# EAGLE board RGB Matrix Panel v26 (EAGLE 6.4), part 1 of 3
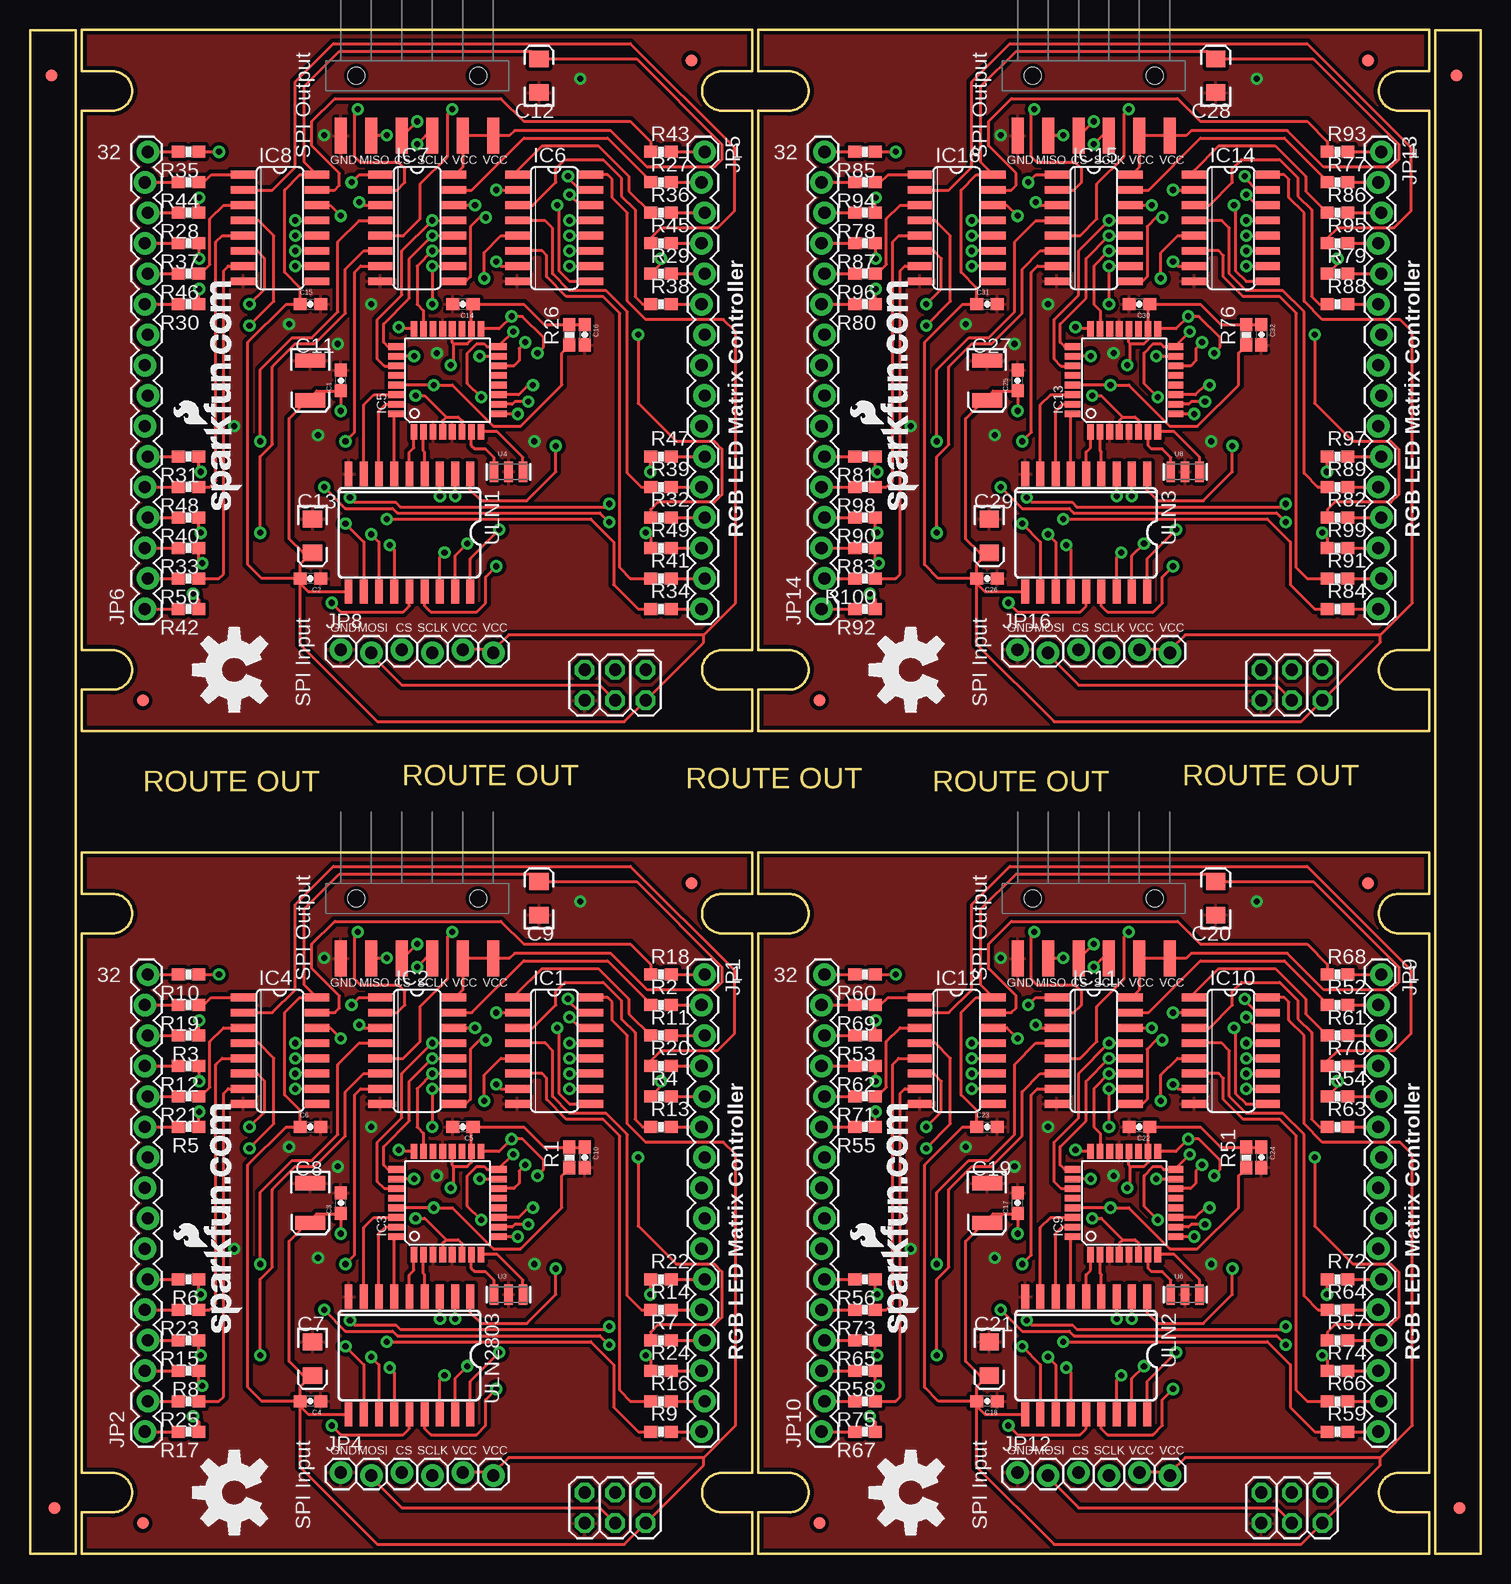
[diagram p0: board, top side]
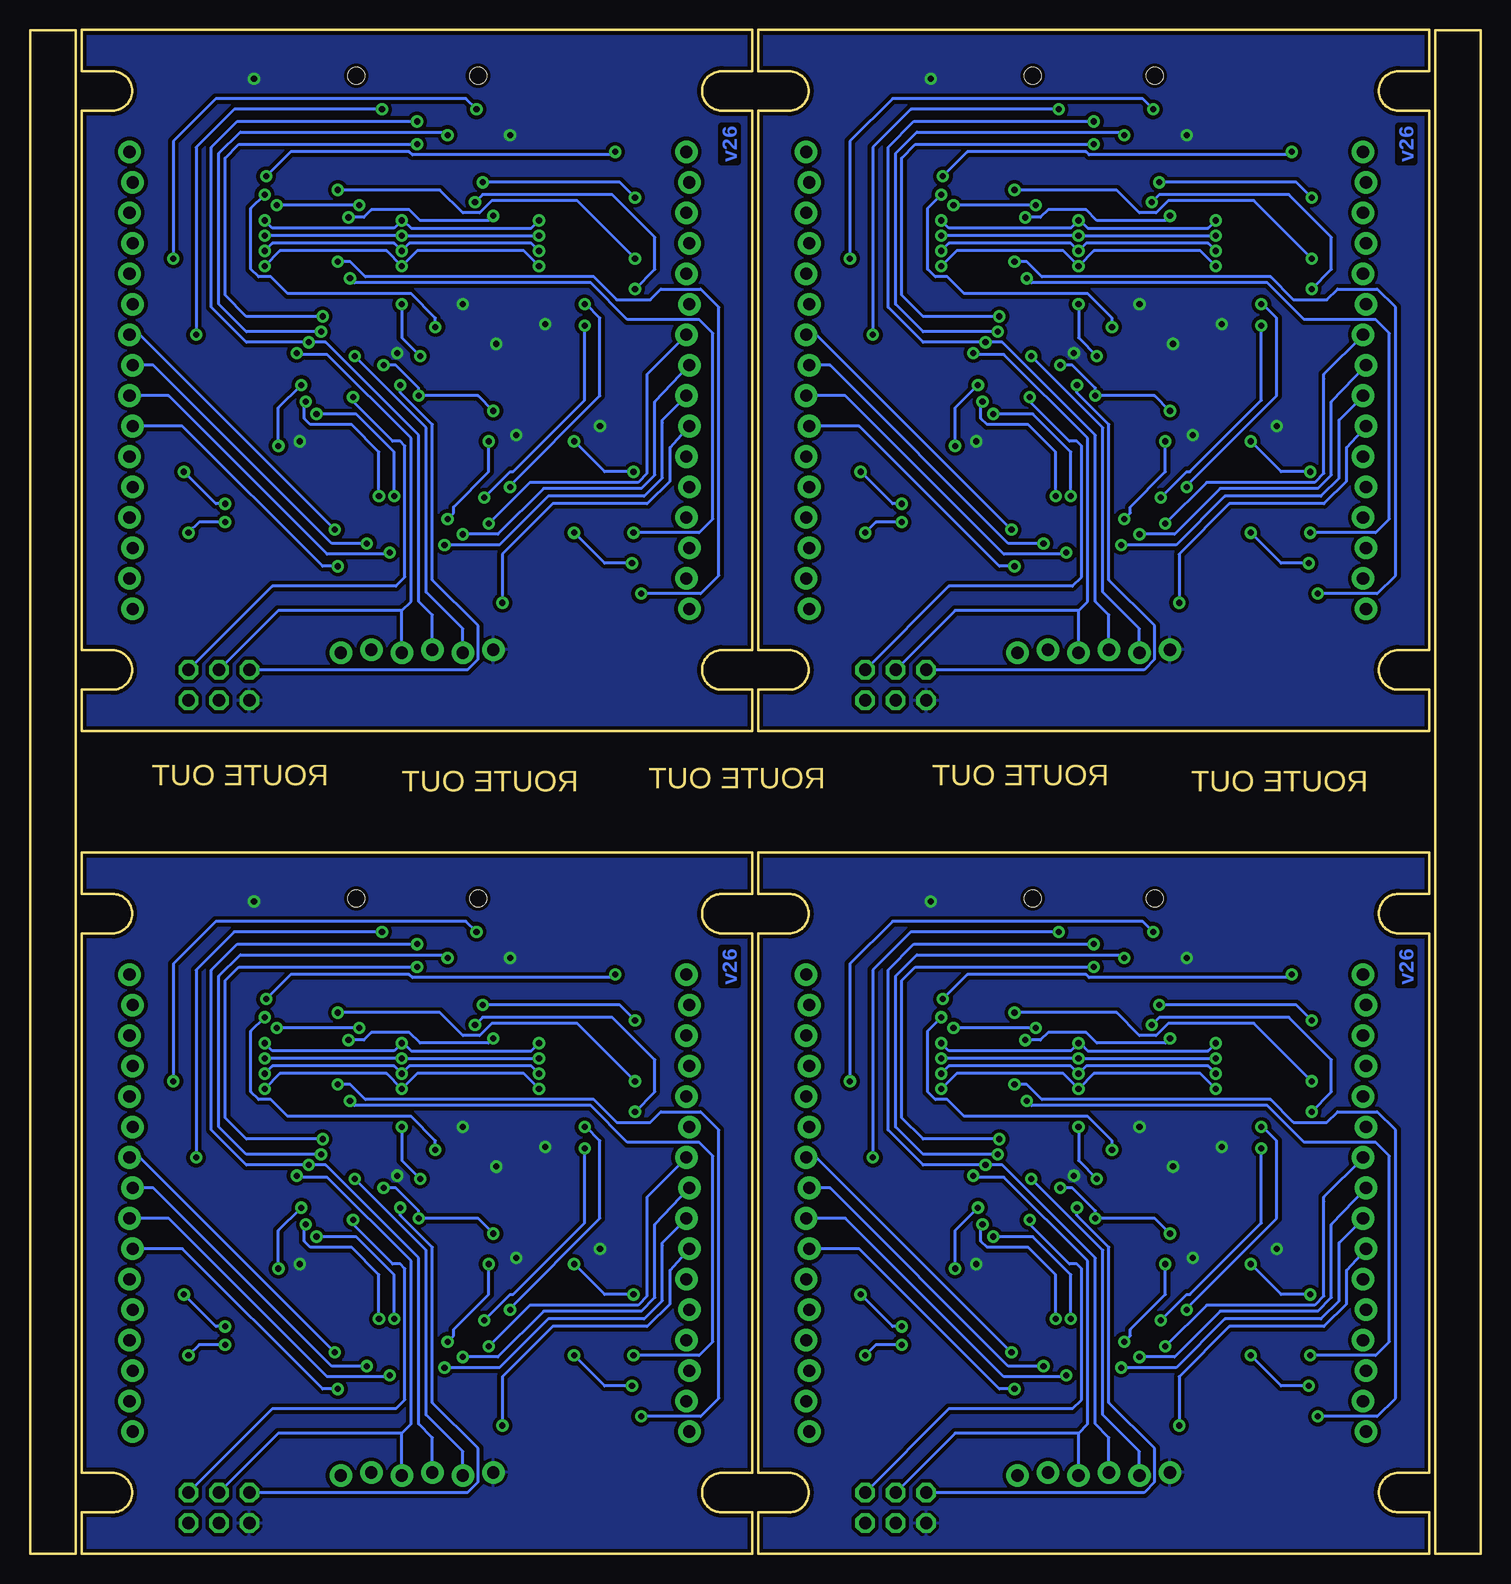
[diagram p1: board, bottom side, seen from below]

Size 120.9 x 127 mm. Coordinates in mm from the lower left corner, seen from the top.
Outline: 60.2,0 60.2,3.43 57.66,3.43 arc-180 57.66,6.73 60.2,6.73 60.2,51.69 57.66,51.69 arc-180 57.66,54.99 60.2,54.99 60.2,58.42 4.32,58.42 4.32,54.99 6.86,54.99 arc-180 6.86,51.69 4.32,51.69 4.32,6.73 6.86,6.73 arc-180 6.86,3.43 4.32,3.43 4.32,0 60.2,0
Outline: 60.2,68.58 60.2,72.01 57.66,72.01 arc-180 57.66,75.31 60.2,75.31 60.2,120.27 57.66,120.27 arc-180 57.66,123.57 60.2,123.57 60.2,127 4.32,127 4.32,123.57 6.86,123.57 arc-180 6.86,120.27 4.32,120.27 4.32,75.31 6.86,75.31 arc-180 6.86,72.01 4.32,72.01 4.32,68.58 60.2,68.58
Outline: 116.59,0 116.59,3.43 114.05,3.43 arc-180 114.05,6.73 116.59,6.73 116.59,51.69 114.05,51.69 arc-180 114.05,54.99 116.59,54.99 116.59,58.42 60.71,58.42 60.71,54.99 63.25,54.99 arc-180 63.25,51.69 60.71,51.69 60.71,6.73 63.25,6.73 arc-180 63.25,3.43 60.71,3.43 60.71,0 116.59,0
Outline: 116.59,68.58 116.59,72.01 114.05,72.01 arc-180 114.05,75.31 116.59,75.31 116.59,120.27 114.05,120.27 arc-180 114.05,123.57 116.59,123.57 116.59,127 60.71,127 60.71,123.57 63.25,123.57 arc-180 63.25,120.27 60.71,120.27 60.71,75.31 63.25,75.31 arc-180 63.25,72.01 60.71,72.01 60.71,68.58 116.59,68.58
Outline: 3.81,0 3.81,127 0,127 0,22.86 0,19.05 0,0 3.81,0
Outline: 120.9,0 120.9,127 117.09,127 117.09,0 120.9,0
Copper layers (1*16): Top 0.035mm / dielectric 1.5mm / Bottom 0.035mm
Design rules "SparkFun": minimum track width 8mil, minimum drill 20mil, track to track 8mil, track to pad 8mil, pad to pad 8mil, via to via 8mil, smd to smd 8mil, copper to edge 10mil, drill to drill 8mil, minimum pad ring 12mil, minimum via ring 10mil, stop-mask expansion 4mil, vias tented up to drill 25mil, thermal gap 10mil
Net classes: 0 default: width 0.203 mm; 1 power: width 0.203 mm

## Footprints (pad centres in the part's own frame; a part is rotated, then mirrored left to right if it is on the bottom)
0603-CAP = smd 1.1 x 1: 1 -0.85,0; 2 0.85,0
EIA3216 = smd 1.4 x 1.6: A 1.4,0; C -1.4,0
EIA3528 = smd 1.2 x 2.5: A 1.65,0; C -1.65,0
FIDUCIAL-1X2 = smd 1 x 1: 1 0,0
SO16 = smd 0.66 x 2.032: 1 -4.445,-3.073; 2 -3.175,-3.073; 3 -1.905,-3.073; 4 -0.635,-3.073; 5 0.635,-3.073; 6 1.905,-3.073; 7 3.175,-3.073; 8 4.445,-3.073; 9 4.445,3.073; 10 3.175,3.073; 11 1.905,3.073; 12 0.635,3.073; 13 -0.635,3.073; 14 -1.905,3.073; 15 -3.175,3.073; 16 -4.445,3.073
TQFP32-08 = smd 1.27 x 0.559: 1 -4.293,2.8; 2 -4.293,2; 3 -4.293,1.2; 4 -4.293,0.4; 5 -4.293,-0.4; 6 -4.293,-1.2; 7 -4.293,-2; 8 -4.293,-2.8; 17 4.293,-2.8; 18 4.293,-2; 19 4.293,-1.2; 20 4.293,-0.4; 21 4.293,0.4; 22 4.293,1.2; 23 4.293,2; 24 4.293,2.8 | smd 0.559 x 1.27: 9 -2.8,-4.293; 10 -2,-4.293; 11 -1.2,-4.293; 12 -0.4,-4.293; 13 0.4,-4.293; 14 1.2,-4.293; 15 2,-4.293; 16 2.8,-4.293; 25 2.8,4.293; 26 2,4.293; 27 1.2,4.293; 28 0.4,4.293; 29 -0.4,4.293; 30 -1.2,4.293; 31 -2,4.293; 32 -2.8,4.293
1X16_LOCK = drill 1.016 pad 1.88: 1 0,0.127; 2 2.54,-0.127; 3 5.08,0.127; 4 7.62,-0.127; 5 10.16,0.127; 6 12.7,-0.127; 7 15.24,0.127; 8 17.78,-0.127; 9 20.32,0.127; 10 22.86,-0.127; 11 25.4,0.127; 12 27.94,-0.127; 13 30.48,0.127; 14 33.02,-0.127; 15 35.56,0.127; 16 38.1,-0.127
1X06-SMD = smd 1 x 3: 1 -6.35,5; 2 -3.81,5; 3 -1.27,5; 4 1.27,5; 5 3.81,5; 6 6.35,5 | hole 1.4: -5.08,0; 5.08,0
1X06_LOCK = drill 1.016 pad 1.88: 1 0,0; 2 2.54,-0.254; 3 5.08,0; 4 7.62,-0.254; 5 10.16,0; 6 12.7,-0.254
0603-RES = smd 1.1 x 1: 1 -0.85,0; 2 0.85,0
2X3 = drill 1.016 octagon: 1 0,0; 2 0,2.54; 3 2.54,0; 4 2.54,2.54; 5 5.08,0; 6 5.08,2.54
RESONATOR-SMD = smd 0.7 x 1.7: 1 -1.2,0; 2 0,0; 3 1.2,0
SO18L = smd 0.66 x 2.032: 1 -0.635,-4.902; 2 0.635,-4.902; 3 1.905,-4.902; 4 3.175,-4.902; 5 4.445,-4.902; 6 5.715,-4.902; 7 6.985,-4.902; 8 8.255,-4.902; 9 9.525,-4.902; 10 9.525,4.902; 11 8.255,4.902; 12 6.985,4.902; 13 5.715,4.902; 14 4.445,4.902; 15 3.175,4.902; 16 1.905,4.902; 17 0.635,4.902; 18 -0.635,4.902

## Placement (x,y rotation side)
C1  0.1uf  [0603-CAP]  25.91,97.79 90 top
C2  0.1uf  [0603-CAP]  23.37,81.28 180 top
C3  0.1uf  [0603-CAP]  25.91,29.21 90 top
C4  0.1uf  [0603-CAP]  23.37,12.7 180 top
C5  0.1uF  [0603-CAP]  36.07,35.56 180 top
C6  0.1uF  [0603-CAP]  23.37,35.56 0 top
C7  10uF  [EIA3216]  23.54,16.24 270 top
C8  47uF  [EIA3528]  23.37,29.21 270 top
C9  10uF  [EIA3216]  42.42,54.61 90 top
C10  0.1uF  [0603-CAP]  46.23,33.02 270 top
C11  47uF  [EIA3528]  23.37,97.79 270 top
C12  10uF  [EIA3216]  42.42,123.19 90 top
C13  10uF  [EIA3216]  23.54,84.82 270 top
C14  0.1uF  [0603-CAP]  36.07,104.14 180 top
C15  0.1uF  [0603-CAP]  23.37,104.14 0 top
C16  0.1uF  [0603-CAP]  46.23,101.6 270 top
C17  0.1uf  [0603-CAP]  82.3,29.21 90 top
C18  0.1uf  [0603-CAP]  79.76,12.7 180 top
C19  47uF  [EIA3528]  79.76,29.21 270 top
C20  10uF  [EIA3216]  98.81,54.61 90 top
C21  10uF  [EIA3216]  79.93,16.24 270 top
C22  0.1uF  [0603-CAP]  92.46,35.56 180 top
C23  0.1uF  [0603-CAP]  79.76,35.56 0 top
C24  0.1uF  [0603-CAP]  102.62,33.02 270 top
C25  0.1uf  [0603-CAP]  82.3,97.79 90 top
C26  0.1uf  [0603-CAP]  79.76,81.28 180 top
C27  47uF  [EIA3528]  79.76,97.79 270 top
C28  10uF  [EIA3216]  98.81,123.19 90 top
C29  10uF  [EIA3216]  79.93,84.82 270 top
C30  0.1uF  [0603-CAP]  92.46,104.14 180 top
C31  0.1uF  [0603-CAP]  79.76,104.14 0 top
C32  0.1uF  [0603-CAP]  102.62,101.6 270 top
E$1  [FIDUCIAL-1X2]  2.03,3.81 0 top
E$2  [FIDUCIAL-1X2]  119.13,3.81 0 top
E$3  [FIDUCIAL-1X2]  118.87,123.19 180 top
E$4  [FIDUCIAL-1X2]  1.78,123.19 180 top
IC1  74LS595D  [SO16]  43.69,41.91 270 top
IC2  74LS595D  [SO16]  32.26,41.91 270 top
IC3  AVR-MEGA8-AI  [TQFP32-08]  34.79,29.22 90 top
IC4  74LS595D  [SO16]  20.83,41.91 270 top
IC5  AVR-MEGA8-AI  [TQFP32-08]  34.79,97.8 90 top
IC6  74LS595D  [SO16]  43.69,110.49 270 top
IC7  74LS595D  [SO16]  32.26,110.49 270 top
IC8  74LS595D  [SO16]  20.83,110.49 270 top
IC9  AVR-MEGA8-AI  [TQFP32-08]  91.18,29.22 90 top
IC10  74LS595D  [SO16]  100.08,41.91 270 top
IC11  74LS595D  [SO16]  88.65,41.91 270 top
IC12  74LS595D  [SO16]  77.22,41.91 270 top
IC13  AVR-MEGA8-AI  [TQFP32-08]  91.18,97.8 90 top
IC14  74LS595D  [SO16]  100.08,110.49 270 top
IC15  74LS595D  [SO16]  88.65,110.49 270 top
IC16  74LS595D  [SO16]  77.22,110.49 270 top
JP1  M16LOCK  [1X16_LOCK]  56.09,48.26 270 top
JP2  M16LOCK  [1X16_LOCK]  9.69,10.16 90 top
JP3  [1X06-SMD]  32.26,54.61 180 top
JP4  [1X06_LOCK]  25.91,6.76 0 top
JP5  M16LOCK  [1X16_LOCK]  56.09,116.84 270 top
JP6  M16LOCK  [1X16_LOCK]  9.69,78.74 90 top
JP7  [1X06-SMD]  32.26,123.19 180 top
JP8  [1X06_LOCK]  25.91,75.34 0 top
JP9  M16LOCK  [1X16_LOCK]  112.48,48.26 270 top
JP10  M16LOCK  [1X16_LOCK]  66.08,10.16 90 top
JP11  [1X06-SMD]  88.65,54.61 180 top
JP12  [1X06_LOCK]  82.3,6.76 0 top
JP13  M16LOCK  [1X16_LOCK]  112.48,116.84 270 top
JP14  M16LOCK  [1X16_LOCK]  66.08,78.74 90 top
JP15  [1X06-SMD]  88.65,123.19 180 top
JP16  [1X06_LOCK]  82.3,75.34 0 top
LOGO1  OSHW-LOGOL  [OSHW-LOGO-L]  17.02,5.08 90 top
LOGO2  OSHW-LOGOL  [OSHW-LOGO-L]  17.02,73.66 90 top
LOGO3  OSHW-LOGOL  [OSHW-LOGO-L]  73.41,5.08 90 top
LOGO4  OSHW-LOGOL  [OSHW-LOGO-L]  73.41,73.66 90 top
R1  10k  [0603-RES]  44.96,33.02 90 top
R2  100  [0603-RES]  52.58,45.72 0 top
R3  100  [0603-RES]  13.21,43.18 180 top
R4  100  [0603-RES]  52.58,38.1 0 top
R5  100  [0603-RES]  13.21,35.56 180 top
R6  100  [0603-RES]  13.21,22.86 180 top
R7  100  [0603-RES]  52.58,17.78 0 top
R8  100  [0603-RES]  13.21,15.24 180 top
R9  100  [0603-RES]  52.58,10.16 0 top
R10  100  [0603-RES]  13.21,48.26 180 top
R11  100  [0603-RES]  52.58,43.18 0 top
R12  100  [0603-RES]  13.21,40.64 180 top
R13  100  [0603-RES]  52.58,35.56 0 top
R14  100  [0603-RES]  52.58,20.32 0 top
R15  100  [0603-RES]  13.21,17.78 180 top
R16  100  [0603-RES]  52.58,12.7 0 top
R17  100  [0603-RES]  13.21,10.16 180 top
R18  100  [0603-RES]  52.58,48.26 0 top
R19  100  [0603-RES]  13.21,45.72 180 top
R20  100  [0603-RES]  52.58,40.64 0 top
R21  100  [0603-RES]  13.21,38.1 180 top
R22  100  [0603-RES]  52.58,22.86 0 top
R23  100  [0603-RES]  13.21,20.32 180 top
R24  100  [0603-RES]  52.58,15.24 0 top
R25  100  [0603-RES]  13.21,12.7 180 top
R26  10k  [0603-RES]  44.96,101.6 90 top
R27  100  [0603-RES]  52.58,114.3 0 top
R28  100  [0603-RES]  13.21,111.76 180 top
R29  100  [0603-RES]  52.58,106.68 0 top
R30  100  [0603-RES]  13.21,104.14 180 top
R31  100  [0603-RES]  13.21,91.44 180 top
R32  100  [0603-RES]  52.58,86.36 0 top
R33  100  [0603-RES]  13.21,83.82 180 top
R34  100  [0603-RES]  52.58,78.74 0 top
R35  100  [0603-RES]  13.21,116.84 180 top
R36  100  [0603-RES]  52.58,111.76 0 top
R37  100  [0603-RES]  13.21,109.22 180 top
R38  100  [0603-RES]  52.58,104.14 0 top
R39  100  [0603-RES]  52.58,88.9 0 top
R40  100  [0603-RES]  13.21,86.36 180 top
R41  100  [0603-RES]  52.58,81.28 0 top
R42  100  [0603-RES]  13.21,78.74 180 top
R43  100  [0603-RES]  52.58,116.84 0 top
R44  100  [0603-RES]  13.21,114.3 180 top
R45  100  [0603-RES]  52.58,109.22 0 top
R46  100  [0603-RES]  13.21,106.68 180 top
R47  100  [0603-RES]  52.58,91.44 0 top
R48  100  [0603-RES]  13.21,88.9 180 top
R49  100  [0603-RES]  52.58,83.82 0 top
R50  100  [0603-RES]  13.21,81.28 180 top
R51  10k  [0603-RES]  101.35,33.02 90 top
R52  100  [0603-RES]  108.97,45.72 0 top
R53  100  [0603-RES]  69.6,43.18 180 top
R54  100  [0603-RES]  108.97,38.1 0 top
R55  100  [0603-RES]  69.6,35.56 180 top
R56  100  [0603-RES]  69.6,22.86 180 top
R57  100  [0603-RES]  108.97,17.78 0 top
R58  100  [0603-RES]  69.6,15.24 180 top
R59  100  [0603-RES]  108.97,10.16 0 top
R60  100  [0603-RES]  69.6,48.26 180 top
R61  100  [0603-RES]  108.97,43.18 0 top
R62  100  [0603-RES]  69.6,40.64 180 top
R63  100  [0603-RES]  108.97,35.56 0 top
R64  100  [0603-RES]  108.97,20.32 0 top
R65  100  [0603-RES]  69.6,17.78 180 top
R66  100  [0603-RES]  108.97,12.7 0 top
R67  100  [0603-RES]  69.6,10.16 180 top
R68  100  [0603-RES]  108.97,48.26 0 top
R69  100  [0603-RES]  69.6,45.72 180 top
R70  100  [0603-RES]  108.97,40.64 0 top
R71  100  [0603-RES]  69.6,38.1 180 top
R72  100  [0603-RES]  108.97,22.86 0 top
R73  100  [0603-RES]  69.6,20.32 180 top
R74  100  [0603-RES]  108.97,15.24 0 top
R75  100  [0603-RES]  69.6,12.7 180 top
R76  10k  [0603-RES]  101.35,101.6 90 top
R77  100  [0603-RES]  108.97,114.3 0 top
R78  100  [0603-RES]  69.6,111.76 180 top
R79  100  [0603-RES]  108.97,106.68 0 top
R80  100  [0603-RES]  69.6,104.14 180 top
R81  100  [0603-RES]  69.6,91.44 180 top
R82  100  [0603-RES]  108.97,86.36 0 top
R83  100  [0603-RES]  69.6,83.82 180 top
R84  100  [0603-RES]  108.97,78.74 0 top
R85  100  [0603-RES]  69.6,116.84 180 top
R86  100  [0603-RES]  108.97,111.76 0 top
R87  100  [0603-RES]  69.6,109.22 180 top
R88  100  [0603-RES]  108.97,104.14 0 top
R89  100  [0603-RES]  108.97,88.9 0 top
R90  100  [0603-RES]  69.6,86.36 180 top
R91  100  [0603-RES]  108.97,81.28 0 top
R92  100  [0603-RES]  69.6,78.74 180 top
R93  100  [0603-RES]  108.97,116.84 0 top
R94  100  [0603-RES]  69.6,114.3 180 top
R95  100  [0603-RES]  108.97,109.22 0 top
R96  100  [0603-RES]  69.6,106.68 180 top
R97  100  [0603-RES]  108.97,91.44 0 top
R98  100  [0603-RES]  69.6,88.9 180 top
R99  100  [0603-RES]  108.97,83.82 0 top
R100  100  [0603-RES]  69.6,81.28 180 top
U1  AVR_SPI_PRG_6PTH  [2X3]  51.31,73.66 180 top
U2  AVR_SPI_PRG_6PTH  [2X3]  51.31,5.08 180 top
U3  16 MHz  [RESONATOR-SMD]  39.88,21.59 0 top
U4  16 MHz  [RESONATOR-SMD]  39.88,90.17 0 top
U5  AVR_SPI_PRG_6PTH  [2X3]  107.7,5.08 180 top
U6  16 MHz  [RESONATOR-SMD]  96.27,21.59 0 top
U7  AVR_SPI_PRG_6PTH  [2X3]  107.7,73.66 180 top
U8  16 MHz  [RESONATOR-SMD]  96.27,90.17 0 top
U$1  FIDUCIAL1X2  [FIDUCIAL-1X2]  9.4,2.54 90 top
U$2  FIDUCIAL1X2  [FIDUCIAL-1X2]  9.4,71.12 90 top
U$3  FIDUCIAL1X2  [FIDUCIAL-1X2]  55.12,55.88 90 top
U$4  FIDUCIAL1X2  [FIDUCIAL-1X2]  55.12,124.46 90 top
U$5  [SFE-NEW-WEBLOGO]  17.65,87 90 top
U$6  FIDUCIAL1X2  [FIDUCIAL-1X2]  65.79,2.54 90 top
U$7  FIDUCIAL1X2  [FIDUCIAL-1X2]  111.51,55.88 90 top
U$8  [SFE-NEW-WEBLOGO]  17.65,18.41 90 top
U$9  [SFE-NEW-WEBLOGO]  74.04,18.41 90 top
U$10  FIDUCIAL1X2  [FIDUCIAL-1X2]  65.79,71.12 90 top
U$11  FIDUCIAL1X2  [FIDUCIAL-1X2]  111.51,124.46 90 top
U$12  [SFE-NEW-WEBLOGO]  74.04,87 90 top
ULN1  [SO18L]  36.07,85.09 180 top
ULN2  [SO18L]  92.46,16.51 180 top
ULN3  [SO18L]  92.46,85.09 180 top
ULN2803  [SO18L]  36.07,16.51 180 top

## Library data of the parts
C1-C6 C10 C14-C18 C22-C26 C30-C32 R1-R100 = SparkFun-Passives
C7-C9 C11-C13 C19-C21 C27-C29 IC1-IC16 JP3 JP7 JP11 JP15 U1-U8 U$1-U$12 ULN1-ULN3 ULN2803 = SparkFun
E$1-E$4 LOGO1-LOGO4 = SparkFun-Aesthetics
JP1 JP2 JP4-JP6 JP8-JP10 JP12-JP14 JP16 = SparkFun-Connectors

## Nets
B1: JP1.1 R18.2
B2: JP2.15 R19.2
B3: JP1.4 R20.2
B4: JP2.12 R21.2
B5: JP1.11 R22.2
B6: JP2.5 R23.2
B7: JP1.14 R24.2
B8: JP2.2 R25.2
B9: JP5.1 R43.2
B10: JP6.15 R44.2
B11: JP5.4 R45.2
B12: JP6.12 R46.2
B13: JP5.11 R47.2
B14: JP6.5 R48.2
B15: JP5.14 R49.2
B16: JP6.2 R50.2
B17: JP9.1 R68.2
B18: JP10.15 R69.2
B19: JP9.4 R70.2
B20: JP10.12 R71.2
B21: JP9.11 R72.2
B22: JP10.5 R73.2
B23: JP9.14 R74.2
B24: JP10.2 R75.2
B25: JP13.1 R93.2
B26: JP14.15 R94.2
B27: JP13.4 R95.2
B28: JP14.12 R96.2
B29: JP13.11 R97.2
B30: JP14.5 R98.2
B31: JP13.14 R99.2
B32: JP14.2 R100.2
CS: IC3.14 JP3.4 JP4.3
CS1: IC5.14 JP7.4 JP8.3
CS2: IC9.14 JP11.4 JP12.3
CS3: IC13.14 JP15.4 JP16.3
G1: JP1.2 R2.2
G2: JP2.14 R3.2
G3: JP1.5 R4.2
G4: JP2.11 R5.2
G5: JP2.6 R6.2
G6: JP1.13 R7.2
G7: JP2.3 R8.2
G8: JP1.16 R9.2
G9: JP5.2 R27.2
G10: JP6.14 R28.2
G11: JP5.5 R29.2
G12: JP6.11 R30.2
G13: JP6.6 R31.2
G14: JP5.13 R32.2
G15: JP6.3 R33.2
G16: JP5.16 R34.2
G17: JP9.2 R52.2
G18: JP10.14 R53.2
G19: JP9.5 R54.2
G20: JP10.11 R55.2
G21: JP10.6 R56.2
G22: JP9.13 R57.2
G23: JP10.3 R58.2
G24: JP9.16 R59.2
G25: JP13.2 R77.2
G26: JP14.14 R78.2
G27: JP13.5 R79.2
G28: JP14.11 R80.2
G29: JP14.6 R81.2
G30: JP13.13 R82.2
G31: JP14.3 R83.2
G32: JP13.16 R84.2
GND [power]: C3.2 C4.1 C5.2 C6.2 C7.C C8.C C9.C C10.2 IC1.8 IC2.8 IC3.3 IC3.5 IC3.21 IC4.8 JP3.6 JP4.1 U2.6 U3.2 ULN2803.9
GND1 [power]: C1.2 C2.1 C11.C C12.C C13.C C14.2 C15.2 C16.2 IC5.3 IC5.5 IC5.21 IC6.8 IC7.8 IC8.8 JP7.6 JP8.1 U1.6 U4.2 ULN1.9
GND2 [power]: C17.2 C18.1 C19.C C20.C C21.C C22.2 C23.2 C24.2 IC9.3 IC9.5 IC9.21 IC10.8 IC11.8 IC12.8 JP11.6 JP12.1 U5.6 U6.2 ULN2.9
GND3 [power]: C25.2 C26.1 C27.C C28.C C29.C C30.2 C31.2 C32.2 IC13.3 IC13.5 IC13.21 IC14.8 IC15.8 IC16.8 JP15.6 JP16.1 U7.6 U8.2 ULN3.9
MISO: IC3.16 JP3.5 U2.1
MISO1: IC5.16 JP7.5 U1.1
MISO2: IC9.16 JP11.5 U5.1
MISO3: IC13.16 JP15.5 U7.1
MOSI: IC3.15 JP4.2 U2.4
MOSI1: IC5.15 JP8.2 U1.4
MOSI2: IC9.15 JP12.2 U5.4
MOSI3: IC13.15 JP16.2 U7.4
N$1: IC3.7 U3.1
N$2: IC3.8 U3.3
N$3: IC6.15 R35.1
N$4: IC6.1 R36.1
N$5: IC6.2 R37.1
N$6: IC6.3 R38.1
N$7: IC6.4 R39.1
N$8: IC6.5 R40.1
N$9: IC6.6 R41.1
N$10: IC6.7 R42.1
N$11: IC1.9 IC2.14
N$12: IC1.15 R10.1
N$13: IC1.1 R11.1
N$14: IC1.2 R12.1
N$15: IC1.3 R13.1
N$16: IC2.9 IC4.14
N$17: IC7.15 R27.1
N$18: IC1.4 R14.1
N$19: IC1.5 R15.1
N$20: IC1.6 R16.1
N$21: IC1.7 R17.1
N$22: IC2.15 R2.1
N$23: IC2.1 R3.1
N$24: IC2.2 R4.1
N$25: IC2.3 R5.1
N$26: IC2.4 R6.1
N$27: IC2.5 R7.1
N$28: IC2.6 R8.1
N$29: IC2.7 R9.1
N$30: IC7.1 R28.1
N$31: IC7.2 R29.1
N$32: IC4.15 R18.1
N$33: IC4.1 R19.1
N$34: IC4.2 R20.1
N$35: IC4.3 R21.1
N$36: IC4.4 R22.1
N$37: IC4.5 R23.1
N$38: IC4.6 R24.1
N$39: IC4.7 R25.1
N$40: IC7.3 R30.1
N$41: IC7.4 R31.1
N$42: IC7.5 R32.1
N$43: IC7.6 R33.1
N$44: IC7.7 R34.1
N$45: IC8.15 R43.1
N$46: IC8.1 R44.1
N$47: IC8.2 R45.1
N$48: IC8.3 R46.1
N$49: IC8.4 R47.1
N$50: IC8.5 R48.1
N$51: IC8.6 R49.1
N$52: IC8.7 R50.1
N$53: IC6.9 IC7.14
N$54: IC7.9 IC8.14
N$55: IC5.7 U4.1
N$56: IC5.8 U4.3
N$57: IC10.15 R60.1
N$58: IC10.1 R61.1
N$59: IC10.2 R62.1
N$60: IC10.3 R63.1
N$61: IC10.4 R64.1
N$62: IC10.5 R65.1
N$63: IC10.6 R66.1
N$64: IC10.7 R67.1
N$65: IC11.15 R52.1
N$66: IC11.1 R53.1
N$67: IC11.2 R54.1
N$68: IC11.3 R55.1
N$69: IC11.4 R56.1
N$70: IC11.5 R57.1
N$71: IC11.6 R58.1
N$72: IC11.7 R59.1
N$73: IC12.15 R68.1
N$74: IC12.1 R69.1
N$75: IC12.2 R70.1
N$76: IC12.3 R71.1
N$77: IC12.4 R72.1
N$78: IC12.5 R73.1
N$79: IC12.6 R74.1
N$80: IC12.7 R75.1
N$81: IC10.9 IC11.14
N$82: IC11.9 IC12.14
N$83: IC9.7 U6.1
N$84: IC9.8 U6.3
N$85: IC14.15 R85.1
N$86: IC14.1 R86.1
N$87: IC14.2 R87.1
N$88: IC14.3 R88.1
N$89: IC14.4 R89.1
N$90: IC14.5 R90.1
N$91: IC14.6 R91.1
N$92: IC14.7 R92.1
N$93: IC15.15 R77.1
N$94: IC15.1 R78.1
N$95: IC15.2 R79.1
N$96: IC15.3 R80.1
N$97: IC15.4 R81.1
N$98: IC15.5 R82.1
N$99: IC15.6 R83.1
N$100: IC15.7 R84.1
N$101: IC16.15 R93.1
N$102: IC16.1 R94.1
N$103: IC16.2 R95.1
N$104: IC16.3 R96.1
N$105: IC16.4 R97.1
N$106: IC16.5 R98.1
N$107: IC16.6 R99.1
N$108: IC16.7 R100.1
N$109: IC14.9 IC15.14
N$110: IC15.9 IC16.14
N$111: IC13.7 U8.1
N$112: IC13.8 U8.3
R1: JP2.16 R10.2
R2: JP1.3 R11.2
R3: JP2.13 R12.2
R4: JP1.6 R13.2
R5: JP1.12 R14.2
R6: JP2.4 R15.2
R7: JP1.15 R16.2
R8: JP2.1 R17.2
R9: JP6.16 R35.2
R10: JP5.3 R36.2
R11: JP6.13 R37.2
R12: JP5.6 R38.2
R13: JP5.12 R39.2
R14: JP6.4 R40.2
R15: JP5.15 R41.2
R16: JP6.1 R42.2
R17: JP10.16 R60.2
R18: JP9.3 R61.2
R19: JP10.13 R62.2
R20: JP9.6 R63.2
R21: JP9.12 R64.2
R22: JP10.4 R65.2
R23: JP9.15 R66.2
R24: JP10.1 R67.2
R25: JP14.16 R85.2
R26: JP13.3 R86.2
R27: JP14.13 R87.2
R28: JP13.6 R88.2
R29: JP13.12 R89.2
R30: JP14.4 R90.2
R31: JP13.15 R91.2
R32: JP14.1 R92.2
ROW1 [power]: JP2.10 ULN2803.11
ROW2 [power]: JP2.9 ULN2803.12
ROW3 [power]: JP2.8 ULN2803.13
ROW4 [power]: JP2.7 ULN2803.14
ROW5 [power]: JP1.10 ULN2803.15
ROW6 [power]: JP1.9 ULN2803.16
ROW7 [power]: JP1.8 ULN2803.17
ROW8 [power]: JP1.7 ULN2803.18
ROW9 [power]: JP5.7 ULN1.18
ROW10 [power]: JP5.8 ULN1.17
ROW11 [power]: JP5.9 ULN1.16
ROW12 [power]: JP5.10 ULN1.15
ROW13 [power]: JP6.7 ULN1.14
ROW14 [power]: JP6.8 ULN1.13
ROW15 [power]: JP6.9 ULN1.12
ROW16 [power]: JP6.10 ULN1.11
ROW17 [power]: JP9.7 ULN2.18
ROW18 [power]: JP9.8 ULN2.17
ROW19 [power]: JP9.9 ULN2.16
ROW20 [power]: JP9.10 ULN2.15
ROW21 [power]: JP10.7 ULN2.14
ROW22 [power]: JP10.8 ULN2.13
ROW23 [power]: JP10.9 ULN2.12
ROW24 [power]: JP10.10 ULN2.11
ROW25 [power]: JP13.7 ULN3.18
ROW26 [power]: JP13.8 ULN3.17
ROW27 [power]: JP13.9 ULN3.16
ROW28 [power]: JP13.10 ULN3.15
ROW29 [power]: JP14.7 ULN3.14
ROW30 [power]: JP14.8 ULN3.13
ROW31 [power]: JP14.9 ULN3.12
ROW32 [power]: JP14.10 ULN3.11
ROW_1: IC3.30 ULN2803.8
ROW_2: IC3.31 ULN2803.7
ROW_3: IC3.32 ULN2803.6
ROW_4: IC3.1 ULN2803.5
ROW_5: IC3.2 ULN2803.4
ROW_6: IC3.9 ULN2803.3
ROW_7: IC3.10 ULN2803.2
ROW_8: IC3.11 ULN2803.1
ROW_9: IC5.11 ULN1.1
ROW_10: IC5.10 ULN1.2
ROW_11: IC5.9 ULN1.3
ROW_12: IC5.2 ULN1.4
ROW_13: IC5.1 ULN1.5
ROW_14: IC5.32 ULN1.6
ROW_15: IC5.31 ULN1.7
ROW_16: IC5.30 ULN1.8
ROW_17: IC9.11 ULN2.1
ROW_18: IC9.10 ULN2.2
ROW_19: IC9.9 ULN2.3
ROW_20: IC9.2 ULN2.4
ROW_21: IC9.1 ULN2.5
ROW_22: IC9.32 ULN2.6
ROW_23: IC9.31 ULN2.7
ROW_24: IC9.30 ULN2.8
ROW_25: IC13.11 ULN3.1
ROW_26: IC13.10 ULN3.2
ROW_27: IC13.9 ULN3.3
ROW_28: IC13.2 ULN3.4
ROW_29: IC13.1 ULN3.5
ROW_30: IC13.32 ULN3.6
ROW_31: IC13.31 ULN3.7
ROW_32: IC13.30 ULN3.8
RST: IC3.29 R1.1 U2.5
RST1: IC5.29 R26.1 U1.5
RST2: IC9.29 R51.1 U5.5
RST3: IC13.29 R76.1 U7.5
SCK: IC3.17 JP3.3 JP4.4 U2.3
SCK1: IC5.17 JP7.3 JP8.4 U1.3
SCK2: IC9.17 JP11.3 JP12.4 U5.3
SCK3: IC13.17 JP15.3 JP16.4 U7.3
SR_CLEAR: IC1.10 IC2.10 IC3.26 IC4.10
SR_CLEAR1: IC5.26 IC6.10 IC7.10 IC8.10
SR_CLEAR2: IC9.26 IC10.10 IC11.10 IC12.10
SR_CLEAR3: IC13.26 IC14.10 IC15.10 IC16.10
SR_DATA: IC1.14 IC3.24
SR_DATA1: IC5.24 IC6.14
SR_DATA2: IC9.24 IC10.14
SR_DATA3: IC13.24 IC14.14
SR_EN: IC1.13 IC2.13 IC3.27 IC4.13
SR_EN1: IC5.27 IC6.13 IC7.13 IC8.13
SR_EN2: IC9.27 IC10.13 IC11.13 IC12.13
SR_EN3: IC13.27 IC14.13 IC15.13 IC16.13
SR_LATCH: IC1.12 IC2.12 IC3.25 IC4.12
SR_LATCH1: IC5.25 IC6.12 IC7.12 IC8.12
SR_LATCH2: IC9.25 IC10.12 IC11.12 IC12.12
SR_LATCH3: IC13.25 IC14.12 IC15.12 IC16.12
SR_SCK: IC1.11 IC2.11 IC3.23 IC4.11
SR_SCK1: IC5.23 IC6.11 IC7.11 IC8.11
SR_SCK2: IC9.23 IC10.11 IC11.11 IC12.11
SR_SCK3: IC13.23 IC14.11 IC15.11 IC16.11
VCC [power]: C3.1 C4.2 C5.1 C6.1 C7.A C8.A C9.A C10.1 IC1.16 IC2.16 IC3.4 IC3.6 IC3.18 IC3.20 IC4.16 JP3.1 JP3.2 JP4.5 JP4.6 R1.2 U2.2 ULN2803.10
VCC1 [power]: C1.1 C2.2 C11.A C12.A C13.A C14.1 C15.1 C16.1 IC5.4 IC5.6 IC5.18 IC5.20 IC6.16 IC7.16 IC8.16 JP7.1 JP7.2 JP8.5 JP8.6 R26.2 U1.2 ULN1.10
VCC2 [power]: C17.1 C18.2 C19.A C20.A C21.A C22.1 C23.1 C24.1 IC9.4 IC9.6 IC9.18 IC9.20 IC10.16 IC11.16 IC12.16 JP11.1 JP11.2 JP12.5 JP12.6 R51.2 U5.2 ULN2.10
VCC3 [power]: C25.1 C26.2 C27.A C28.A C29.A C30.1 C31.1 C32.1 IC13.4 IC13.6 IC13.18 IC13.20 IC14.16 IC15.16 IC16.16 JP15.1 JP15.2 JP16.5 JP16.6 R76.2 U7.2 ULN3.10